# Altium PCB PCB.PcbDoc
Units mm, origin at the board's own origin, x right, y up, seen from the top; angles counter-clockwise.
Board outline 152.4 x 101.6 mm, 2 copper layers (Top Layer, Bottom Layer); 6 components, 4 nets, 15 pads, 0 vias.
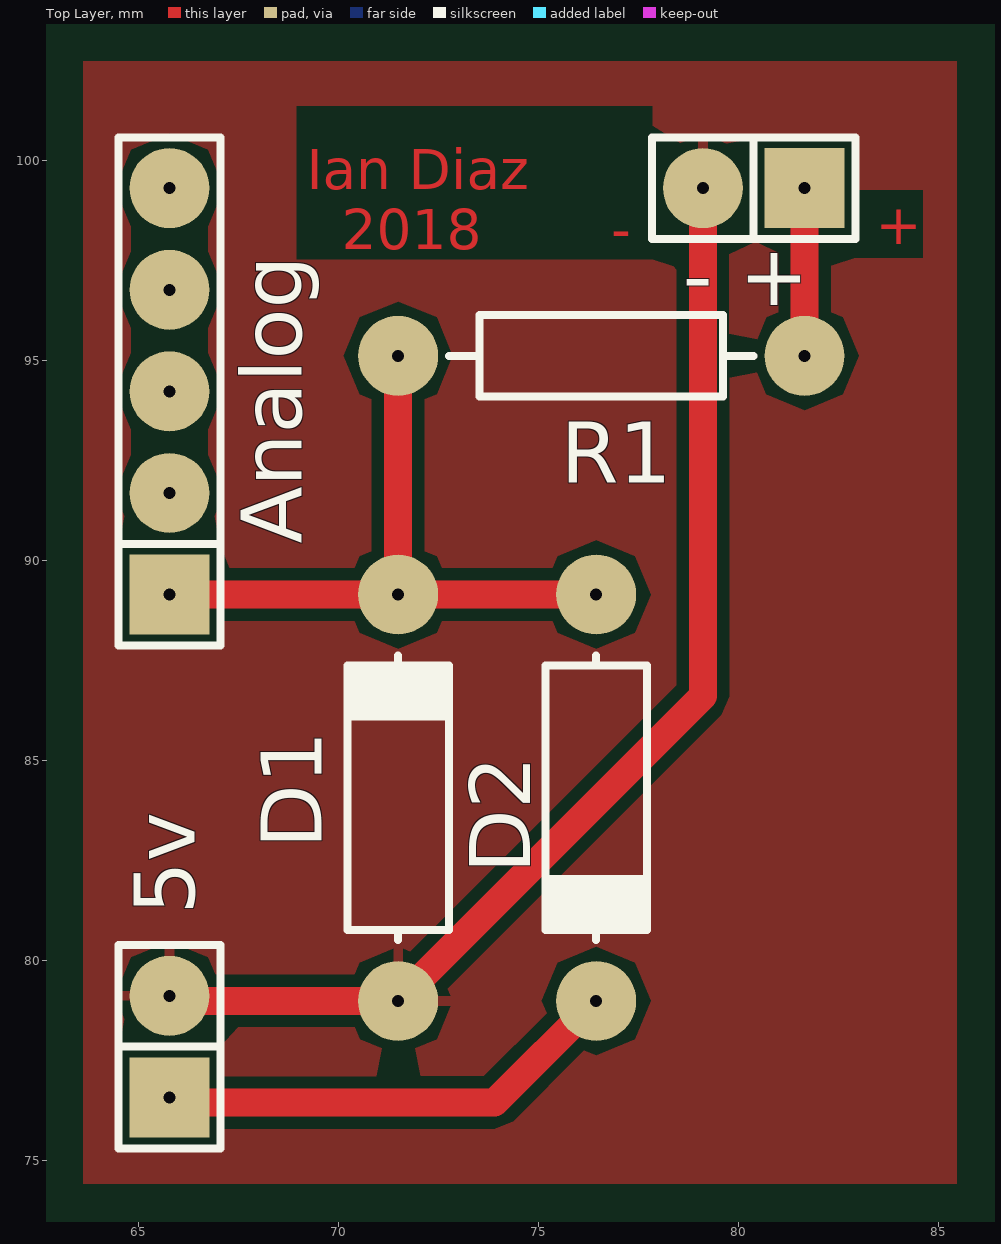
[diagram p0: Top Layer view]
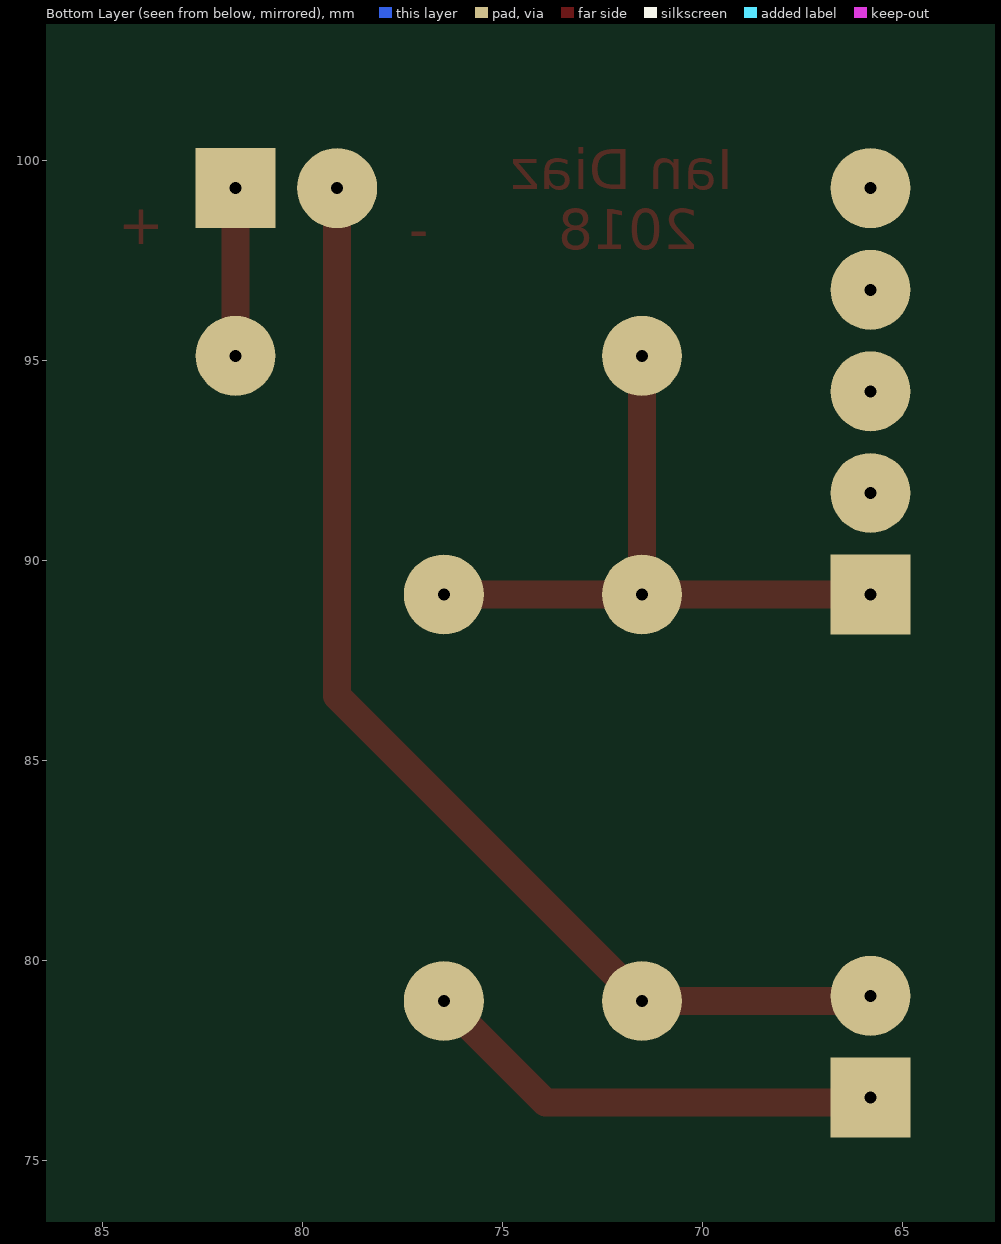
[diagram p1: Bottom Layer view, seen from below]

## Layer stack, top to bottom
Top Solder: solder mask 0.0102, Solder Resist, Dk 3.5
Top Layer: signal copper 0.0356
Dielectric 1: dielectric 0.32, FR-4, Dk 4.8
Bottom Layer: signal copper 0.0356
Bottom Solder: solder mask 0.0102, Solder Resist, Dk 3.5

## Board outline
25.4,25.4 177.8,25.4 177.8,127 25.4,127

## Design rules (kind name [scope] priority, off if disabled: settings)
Clearance [All] p1: gap=0.254 ignorepadtopadclearanceinfootprint=FALSE except(0: Arc-Hole Track-Hole SMDPad-Hole THPad-Hole Via-Hole Fill-Hole Poly-Hole Region-Hole Text-Hole)
PolygonConnect [All] p1: connectstyle=Relief reliefconductorwidth=0.254 reliefentries=4 polygonreliefangle="90 Angle" airgapwidth=0.254
RoutingLayers [All] p1: top layer_v5=TRUE bottom layer_v5=FALSE
RoutingVias [All] p1: holewidth=0.711 width=1.27 viastyle="Through Hole" minholewidth=0.711 minwidth=1.27 maxholewidth=0.711 maxwidth=1.27
SolderMaskExpansion [All] p1: expansion=0.102
Width [All] p1: maxlimit=0.7 minlimit=0.7 preferedwidth=0.7 minimp=50.000000 maximp=50.000000 favimp=50.000000
29 further rules are at their usual default settings.

## Classes and differential pairs
component class Schematic: "- +" Analog D1 D2 R1

## Components (designator, comment, footprint, x,y, rotation, side; value= is the part's Value field where it differs from the comment)
5v "CON2" SIP2 65.786,77.851 r90 top
"- +" "CON2" SIP2 80.391,99.314 r180 top (schematic designator Probe)
Analog "CON5" SIP5 65.786,89.154 r90 top
D1 "DIODO" DO41 71.501,84.074 r90 top
D2 "DIODO" DO41 76.454,84.074 r270 top
R1 "330" RES400 71.501,95.123 r0 top

## Footprints (in the part's own frame and the unit in brackets; to place one, negate y for a bottom-side part, rotate by r counter-clockwise, add the part's x,y. Pads: shape width x height; smd on the part's side, far side on the other; paste and mask are expansions set on the pad)
DO41 [mm]
  round 2 hole 0.3: 1(-5.08,0) 2(5.08,0)
  silkscreen extent -3.56,-1.27 3.56,1.27, body extent -5.46,-1.19 5.46,1.37, height 2.03
RES400 [mm]
  round 2 hole 0.3: 1(0,0) 2(10.16,0)
  silkscreen extent 1.27,-1.02 8.89,1.02, body extent -0.3,-1.14 10.46,1.17, height 2.43
SIP2 [mm]
  rect 2x2 hole 0.3: 1(-1.27,0)
  round 2 hole 0.3: 2(1.27,0)
  silkscreen extent -2.54,-1.27 2.54,1.27
SIP5 [mm]
  rect 2x2 hole 0.3: 1(0,0)
  round 2 hole 0.3: 2(2.54,0) 3(5.08,0) 4(7.62,0) 5(10.16,0)
  silkscreen extent -1.27,-1.27 11.43,1.27, body extent -1.27,-1.27 11.43,1.27, height 8.38

## Part data
R1: library part RES

## Nets (pads, with @x,y where several pads share a name; then routed paths per layer and width w, separated by ;. In a path a pad name is that pad's centre, name@x,y a point inside that pad or via, vN(x,y) a via of type N, cw(c..) or ccw(c..) an arc to the next point about the centre after c; other vN are vias at no path point)
+5: 5v.1 D2.2 | length 11.7
  Top Layer w0.7: 5v.1@65.786,76.454 73.914,76.454 D2.2
A0: Analog.1 D1.2 D2.1 R1.1 | length 16.6
  Top Layer w0.7: Analog.1 D1.2 ; R1.1 D1.2 ; D2.1 D1.2
GND: 5v.2 "- +.2" D1.1 | length 29.2
  Top Layer w0.7: 5v.2@65.786,78.994 D1.1 79.121,86.614 79.121,99.314
VCCPROBE: "- +.1" R1.2 | length 4.2
  Top Layer w0.7: R1.2 81.661,99.314
pads on no net: Analog.2 Analog.3 Analog.4 Analog.5

## Polygon pours and split planes (outlines as drawn)
no net on Bottom Layer "Bottom Layer-No Net" (solid, pour order 2): 63.373,101.6
no net on Bottom Layer "Bottom Layer-No Net 1" (solid, pour order 0): 63.119,75.565
GND on Top Layer (solid, pour order 6): 63.627,102.489 63.627,74.422 85.471,74.422 85.471,102.489

## Other copper
Top Layer:
  text "+" at 83.439,97.917 h1
  text "Ian Diaz /   2018" at 69.215,97.79 h1
  text "-" at 76.835,97.79 h1